# Altium PCB Pira-Smart-RS485-Addon_BAK.PcbDoc (part 2 of 2)
Units mm, origin at the board's own origin, x right, y up, seen from the top; angles counter-clockwise.
Board outline 65.1 x 30.1 mm, 2 copper layers (Top Layer, Bottom Layer); 47 components, 41 nets, 206 pads, 43 vias.
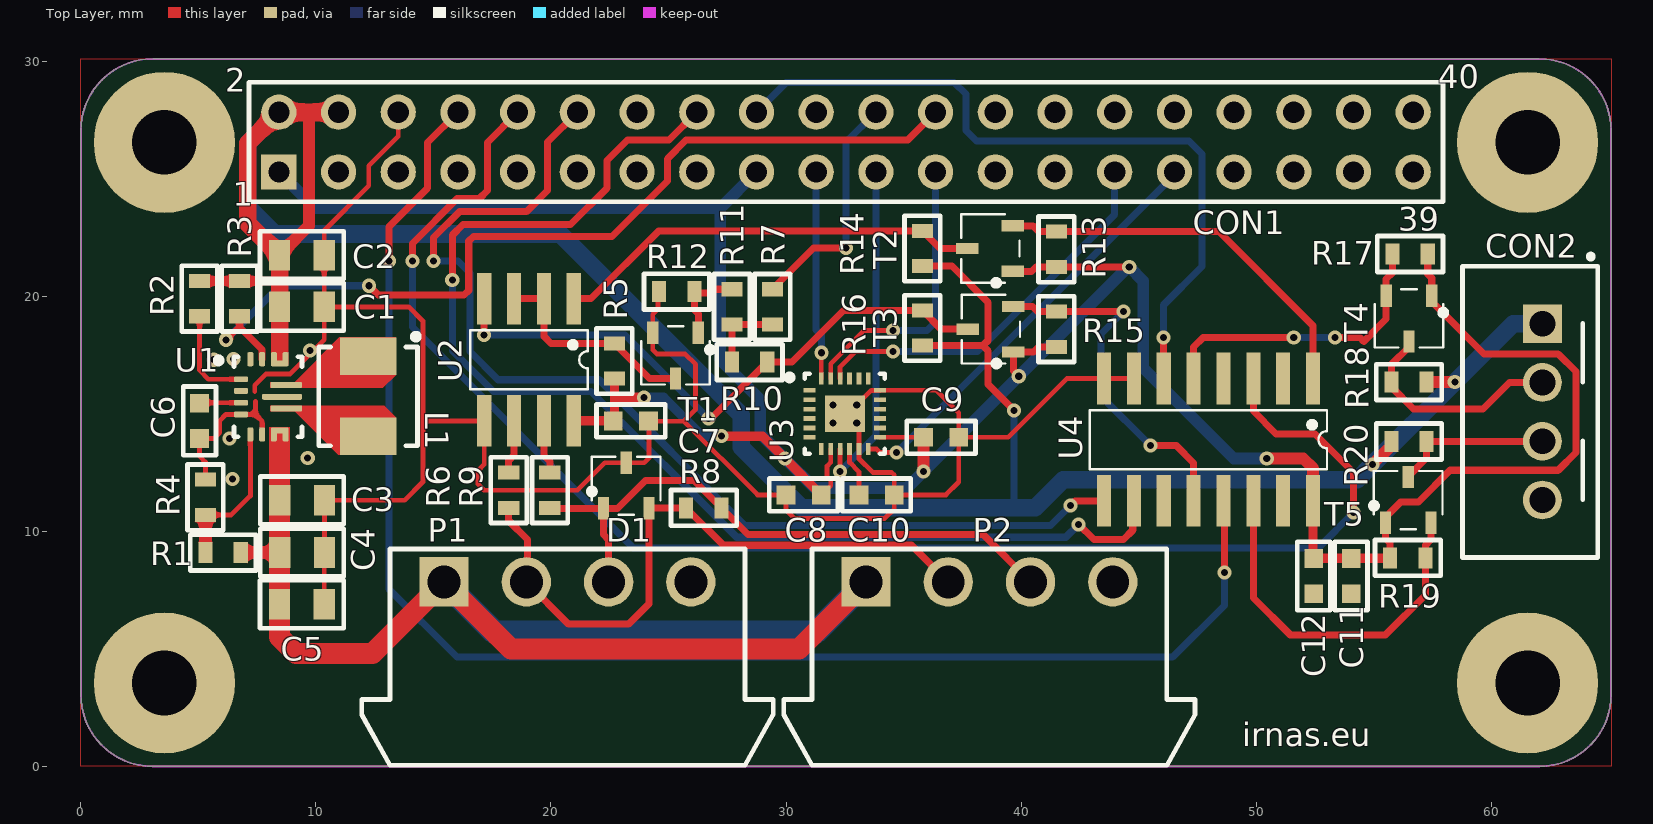
[diagram p0: Top Layer view]

## Silkscreen, mask and mechanical layers (free items; w line width, h text height) (continued)
Bottom Overlay: (continued)
  text "GND" at 59.35,10.75 h1
  text "irnas.eu / PiRA Smart / RS485 Add-On / V1" at 51,8.15 h2
  text "V+" at 14.85,5.6 h1 r270
  text "A" at 18.5,5.6 h1 r270
  text "B" at 21.8,5.6 h1 r270
  text "GND" at 25.4,5.6 h1 r270
  text "V+" at 32.85,5.6 h1 r270
  text "A" at 36.5,5.6 h1 r270
  text "B" at 39.8,5.6 h1 r270
  text "GND" at 43.4,5.6 h1 r270

## Dimensions
0.05,27.05 to 65.05,27.05 on Mechanical 1
62.05,30.05 to 62.2,0.05 on Mechanical 1

## Text inside footprints (layer, text, board x,y; h text height)
CON1: Mechanical 29 "1" at 5.882,24.785 h1.27; Mechanical 29 "2" at 5.882,27.325 h1.27; Mechanical 29 "39" at 58.714,24.785 h1.27; Mechanical 29 "40" at 58.714,27.325 h1.27; Top Overlay "1" at 6.45,23.85 h1; Top Overlay "2" at 6.15,28.7 h1; Top Overlay "40" at 57.75,28.85 h1; Top Overlay "39" at 56.05,22.8 h1